# Altium PCB PCB1.PcbDoc
Units mm, origin at the board's own origin, x right, y up, seen from the top; angles counter-clockwise.
Board outline 86 x 56 mm, 2 copper layers (Top Layer, Bottom Layer), stack 1.771 mm thick; 17 components, 86 nets, 195 pads, 51 vias.
Unrouted connection lines stored in the file: 1.
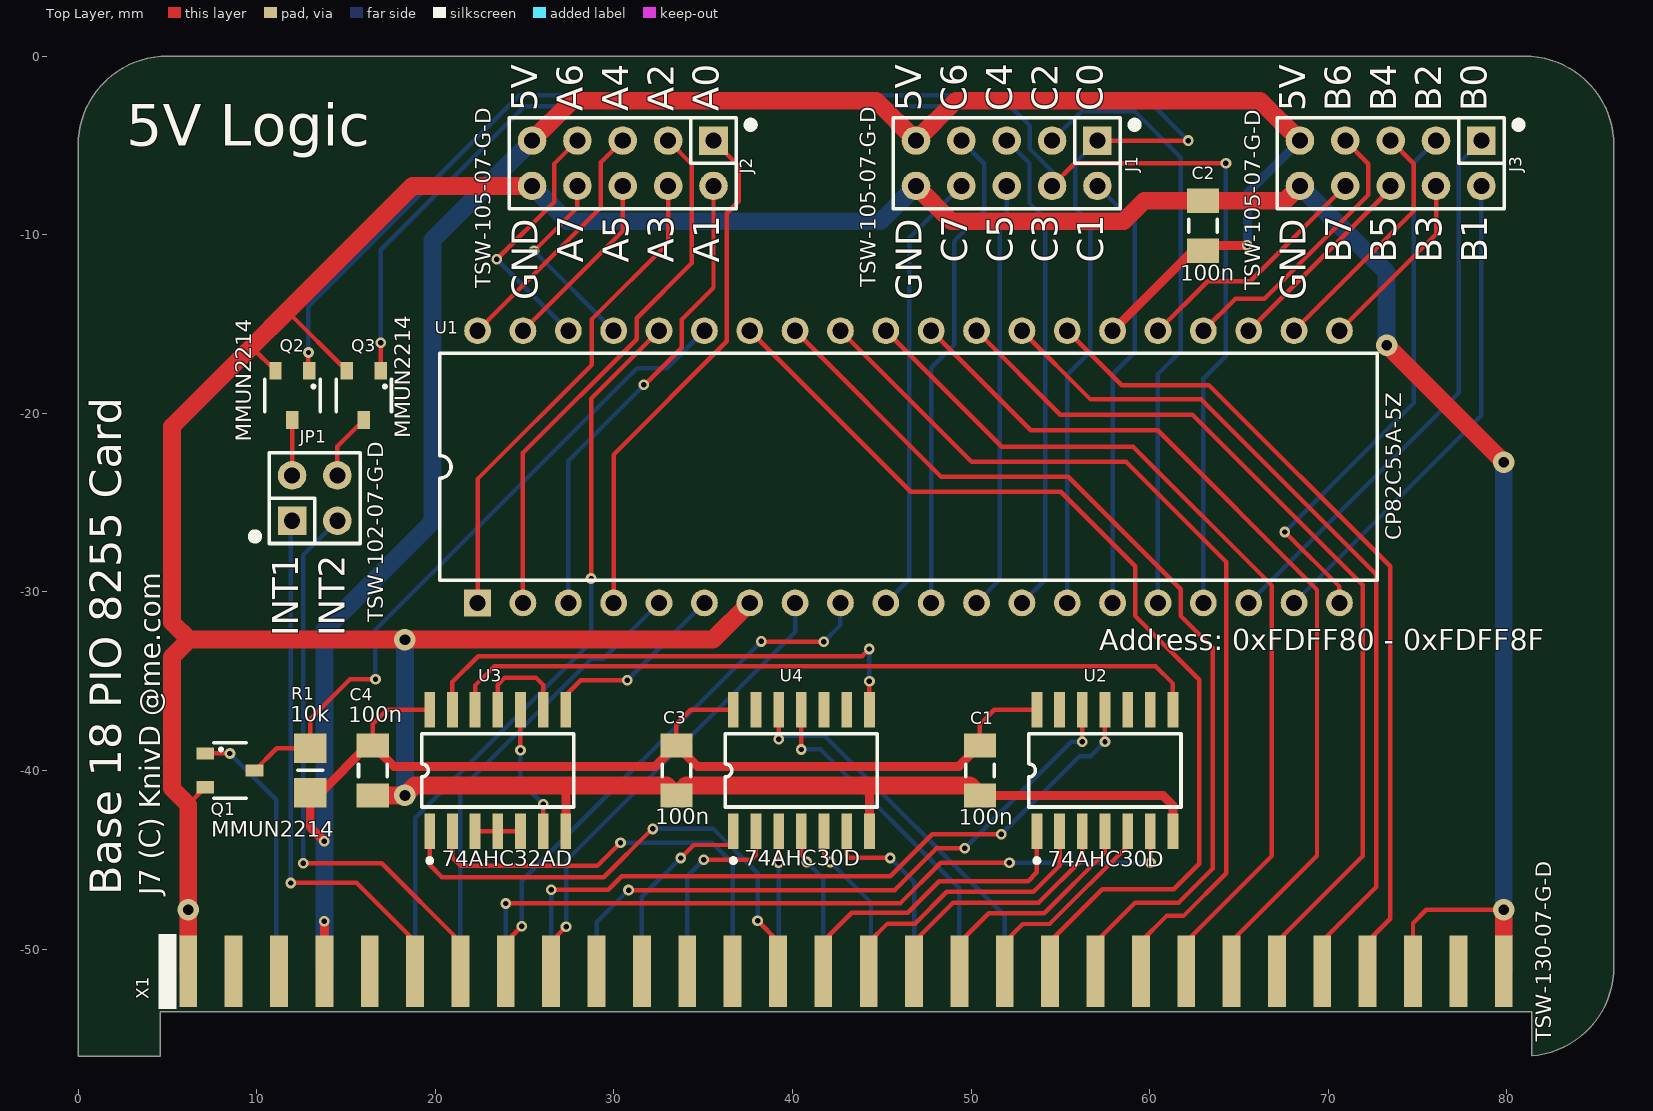
[diagram p0: Top Layer view]
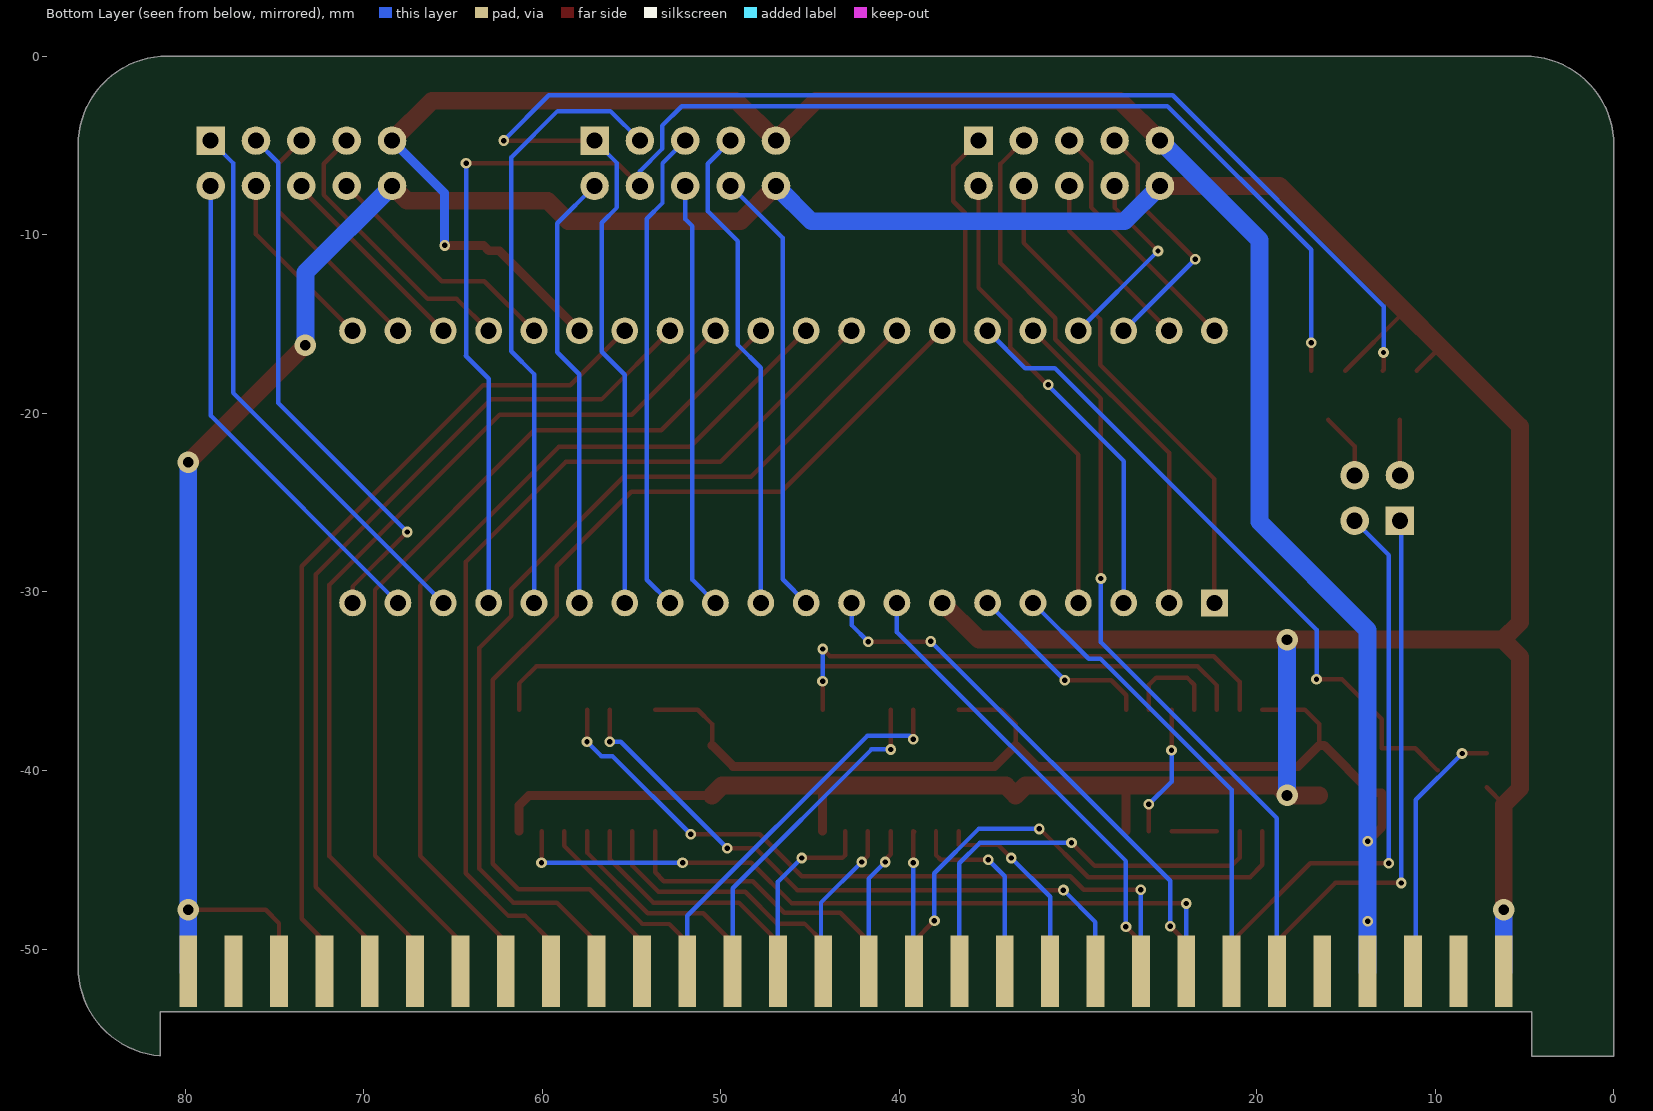
[diagram p1: Bottom Layer view, seen from below]
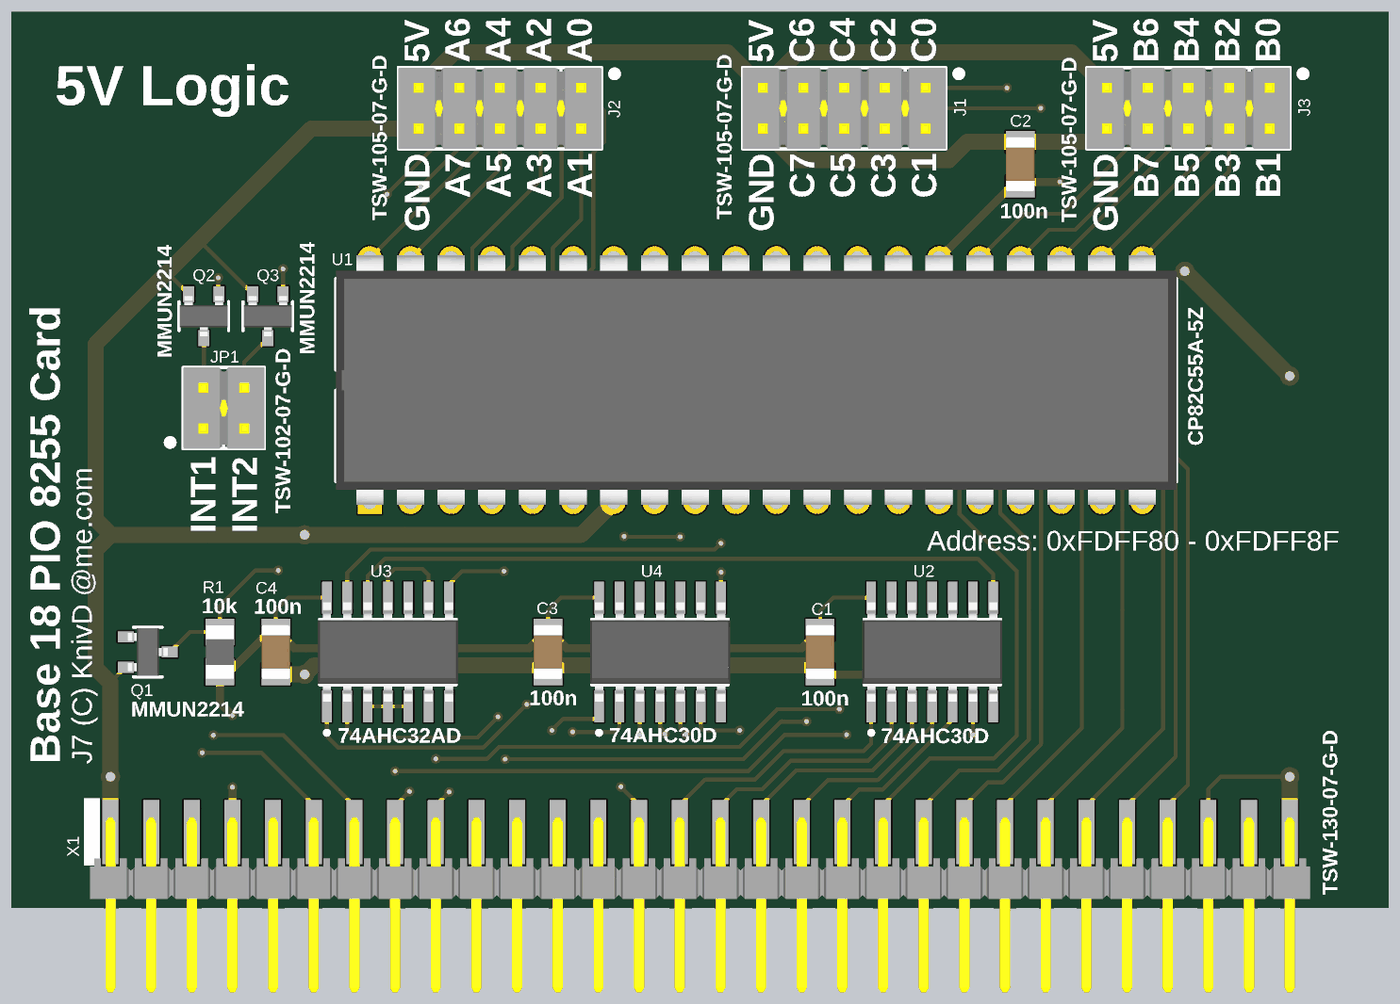
[diagram p2: 3D render of the assembled board from above, using the file's embedded part models]

## Layer stack, top to bottom
Top Solder: solder mask 0.0102, Solder Resist, Dk 3.5
Top Layer: signal copper 0.0356
Dielectric 1: core 1.7, FR-4, Dk 4.2
Bottom Layer: signal copper 0.0356
Solder Side: solder mask 0.0102, Solder Resist, Dk 3.5

## Board outline
0,-56 0,-5 cw(c5,-5) 5,0 81,0 cw(c81,-5) 86,-5 86,-51 cw(c81,-51) 81.399,-55.984 81.4,-55.984 81.4,-53.5 4.6,-53.5 4.6,-56

## Design rules (kind name [scope] priority, off if disabled: settings)
Clearance Clearance_Pour [IsRegion] p1: gap=0.3 ignorepadtopadclearanceinfootprint=TRUE
Clearance [All] p2: gap=0.2 ignorepadtopadclearanceinfootprint=TRUE
Height [All] p1: minheight=0 maxheight=100 prefheight=12.7
HoleSize [All] p1: absolutevalues=TRUE maxlimit=5 minlimit=0.025 maxpercent=80.000 minpercent=20.000
HoleToHoleClearance [All] p1: gap=0 allowstackedmicrovias=TRUE
MinimumSolderMaskSliver [All] p1: minsoldermaskwidth=0
PolygonConnect [All] p1: thpad.connectstyle=Relief thpad.reliefconductorwidth=0.25 thpad.reliefentries=4 thpad.polygonreliefangle="90 Angle" thpad.airgapwidth=0.25 smdpad.connectstyle=Relief smdpad.reliefconductorwidth=0.25 smdpad.reliefentries=4 smdpad.polygonreliefangle="90 Angle" smdpad.airgapwidth=0.25 via.connectstyle=Direct via.reliefconductorwidth=0.254 via.reliefentries=4 via.polygonreliefangle="45 Angle" via.airgapwidth=0.254
RoutingVias [All] p1: holewidth=0.3 width=0.6 viastyle="Through Hole" minholewidth=0.25 minwidth=0.5 maxholewidth=1.5 maxwidth=3
SilkToSilkClearance [All] p1: silktosilkclearance=-10
SilkToSolderMaskClearance [IsPad] p1: minsilkscreentomaskgap=-10 clearancetoexposedcopper=TRUE
SolderMaskExpansion SolderMaskExpansion_VIA [IsVia] p1: expansion=-0.3 soldermaskfromhole=TRUE
SolderMaskExpansion [All] p2: expansion=0.102
Width [All] p1: maxlimit=10 minlimit=0.2 preferedwidth=0.25
24 further rules are at their usual default settings.

## Components (designator, comment, footprint, x,y, rotation, side; value= is the part's Value field where it differs from the comment)
C1 "100n" CAPC3216X110N 50.5,-40 r90 top locked
C2 "100n" CAPC3216X110N 63,-9.5 r270 top locked
C3 "100n" CAPC3216X110N 33.5,-40 r90 top locked
C4 "100n" CAPC3216X110N 16.5,-40 r90 top locked
J1 "TSW-105-07-G-D" 2011-2X05S 52,-6 r180 top locked
J2 "TSW-105-07-G-D" 2011-2X05S 30.5,-6 r180 top locked
J3 "TSW-105-07-G-D" 2011-2X05S 73.5,-6 r180 top locked
JP1 "TSW-102-07-G-D" 2011-2X02S 13.25,-24.75 r0 top locked
Q1 "MMUN2214" SOT23-3 8.5,-40 r270 top locked
Q2 "MMUN2214" SOT23-3 12,-19 r180 top locked
Q3 "MMUN2214" SOT23-3 16,-19 r180 top locked
R1 "10k" RESC3216X75N 13,-40 r90 top locked
U1 "CP82C55A-5Z" DIP40-600 46.5,-23 r90 top locked
U2 "74AHC30D" SOIC14 57.5,-40 r90 top locked
U3 "74AHC32AD" SOIC14 23.5,-40 r90 top locked
U4 "74AHC30D" SOIC14 40.5,-40 r90 top locked
X1 "TSW-130-07-G-D" DIL60-M-EDGE 43,-50.45 r0 top locked

## Footprints (in the part's own frame and the unit in brackets; to place one, negate y for a bottom-side part, rotate by r counter-clockwise, add the part's x,y. Pads: shape width x height; smd on the part's side, far side on the other; paste and mask are expansions set on the pad)
2011-2X02S [mm] "2011-2X02 Straight Pin Header"
  rect 1.6x1.6 hole 0.9: 1(-1.27,-1.27)
  round 1.6 hole 0.9: 2(-1.27,1.27) 3(1.27,-1.27) 4(1.27,1.27)
  silkscreen extent -2.54,-2.54 2.54,2.54, body extent -2.54,-2.54 2.54,2.54, height 8.38
2011-2X05S [mm] "2011-2X05 Straight Pin Header"
  rect 1.6x1.6 hole 0.9: 1(-5.08,-1.27)
  round 1.6 hole 0.9: 2(-5.08,1.27) 3(-2.54,-1.27) 4(-2.54,1.27) 5(0,-1.27) 6(0,1.27) 7(2.54,-1.27) 8(2.54,1.27) 9(5.08,-1.27) 10(5.08,1.27)
  silkscreen extent -6.35,-2.54 6.35,2.54, body extent -6.35,-2.54 6.35,2.54, height 8.38
CAPC3216X110N [mm] "Chip Capacitor, Body 3.2x1.6mm, IPC Medium Density"
  rect 1.35x1.8 smd: 1(-1.4,0) 2(1.4,0)
  silkscreen extent -0.35,-0.8 0.35,0.8, body extent -1.7,-0.9 1.7,0.9, height 1.1
DIL60-M-EDGE [mm] "DIL60 header soldered as edge connector"
  rect 1x4 smd: 1(-36.83,-0.8) 3(-34.29,-0.8) 5(-31.75,-0.8) 7(-29.21,-0.8) 9(-26.67,-0.8) 11(-24.13,-0.8) 13(-21.59,-0.8) 15(-19.05,-0.8) 17(-16.51,-0.8) 19(-13.97,-0.8) 21(-11.43,-0.8) 23(-8.89,-0.8) 25(-6.35,-0.8) 27(-3.81,-0.8) 29(-1.27,-0.8) 31(1.27,-0.8) 33(3.81,-0.8) 35(6.35,-0.8) 37(8.89,-0.8) 39(11.43,-0.8) 41(13.97,-0.8) 43(16.51,-0.8) 45(19.05,-0.8) 47(21.59,-0.8) 49(24.13,-0.8) 51(26.67,-0.8) 53(29.21,-0.8) 55(31.75,-0.8) 57(34.29,-0.8) 59(36.83,-0.8)
  rect 1x4 smd far side: 2(-36.83,-0.8) 4(-34.29,-0.8) 6(-31.75,-0.8) 8(-29.21,-0.8) 10(-26.67,-0.8) 12(-24.13,-0.8) 14(-21.59,-0.8) 16(-19.05,-0.8) 18(-16.51,-0.8) 20(-13.97,-0.8) 22(-11.43,-0.8) 24(-8.89,-0.8) 26(-6.35,-0.8) 28(-3.81,-0.8) 30(-1.27,-0.8) 32(1.27,-0.8) 34(3.81,-0.8) 36(6.35,-0.8) 38(8.89,-0.8) 40(11.43,-0.8) 42(13.97,-0.8) 44(16.51,-0.8) 46(19.05,-0.8) 48(21.59,-0.8) 50(24.13,-0.8) 52(26.67,-0.8) 54(29.21,-0.8) 56(31.75,-0.8) 58(34.29,-0.8) 60(36.83,-0.8)
  silkscreen extent -38.5,-2.9 -37.5,1.3, body extent -38.1,-10.83 38.1,0.09, height 1.64
DIP40-600 [mm] "40 Leads Dual In-Line Package, Row Spacing 15.24mm; Pitch 2.54mm"
  rect 1.5x1.5 hole 0.9: 1(-7.62,24.13)
  round 1.5 hole 0.9: 2(-7.62,21.59) 3(-7.62,19.05) 4(-7.62,16.51) 5(-7.62,13.97) 6(-7.62,11.43) 7(-7.62,8.89) 8(-7.62,6.35) 9(-7.62,3.81) 10(-7.62,1.27) 11(-7.62,-1.27) 12(-7.62,-3.81) 13(-7.62,-6.35) 14(-7.62,-8.89) 15(-7.62,-11.43) 16(-7.62,-13.97) 17(-7.62,-16.51) 18(-7.62,-19.05) 19(-7.62,-21.59) 20(-7.62,-24.13) 21(7.62,-24.13) 22(7.62,-21.59) 23(7.62,-19.05) 24(7.62,-16.51) 25(7.62,-13.97) 26(7.62,-11.43) 27(7.62,-8.89) 28(7.62,-6.35) 29(7.62,-3.81) 30(7.62,-1.27) 31(7.62,1.27) 32(7.62,3.81) 33(7.62,6.35) 34(7.62,8.89) 35(7.62,11.43) 36(7.62,13.97) 37(7.62,16.51) 38(7.62,19.05) 39(7.62,21.59) 40(7.62,24.13)
  silkscreen extent -6.35,-26.25 6.35,26.25, body extent -7.8,-26.25 7.8,26.25, height 4.7
RESC3216X75N [mm] "Chip Resistor, EIA 1206, Metric 3216, Body 3.2x1.6mm, IPC Medium Density"
  rect 1.65x1.8 smd: 1(-1.25,0) 2(1.25,0)
  silkscreen extent 0,-0.7 0,0.7, body extent -1.67,-0.87 1.68,0.88, height 0.75
SOIC14 [mm] "SOIC14 Package"
  rect 2x0.6 smd: 1(-3.4,3.81) 2(-3.4,2.54) 3(-3.4,1.27) 4(-3.4,0) 5(-3.4,-1.27) 6(-3.4,-2.54) 7(-3.4,-3.81) 8(3.4,-3.81) 9(3.4,-2.54) 10(3.4,-1.27) 11(3.4,0) 12(3.4,1.27) 13(3.4,2.54) 14(3.4,3.81)
  silkscreen extent -5.17,-4.26 2.05,4.26, body extent -3.1,-4.38 3.1,4.37, height 1.75
SOT23-3 [mm] "SOT23-3 Package"
  rect 0.69x0.99 smd: 1(-0.95,-1.375) 2(0.95,-1.375) 3(0,1.375)
  silkscreen extent -1.55,-0.9 1.55,0.9, body extent -1.5,-1.25 1.5,1.25, height 1.2

## Part data
C1 C2 C3 C4: library part Capacitor, "Capacitor"
J1 J2 J3: library part "Connector 2x5", "Dual row, 10-way connector"
JP1: library part "Jumper 2x2", "2.54mm square pin header/jumper"
Q1 Q2 Q3: library part "NPN BIASED", "NPN biased bipolar transistor"
R1: library part Resistor, "Resistor"
U1: library part "82C55A DIP40", "CMOS Programmable Peripheral Interface", Manufacturer=Renesas
U2 U4: library part 74HCT30N, "8-Input NAND Gate", Case=DIP14-300, Manufacturer="NXP SEMICONDUCTORS", Author="CERN DEM JLC", ComponentHeight=4.2mm, Component Type=Standard, CreateDate=11/12/2012, Device=74HCT30N, HelpURL=\\cern.ch\dfs\Applications\Altium\Datasheets\74HCT30N.pdf, LatestRevisionDate=11/12/2012, Manufacturer Part Number=74HCT30N, Mounted=Yes, PackageDescription="DIP; 14 Leads; Row Spacing 7.62 mm; Pitch 2.54 mm", Part Description="8-Input NAND Gate", Part Number=74HCT30N, Pin Count=11, SMD=No, Socket=Yes, Table="Standard Logic"
U3: library part 74HCT32N, "Quad 2-Input OR Gate", Case=DIP14-300, Manufacturer="NXP SEMICONDUCTORS", Author="CERN DEM JLC", ComponentHeight=4.2mm, Component Type=Standard, CreateDate=11/12/2012, Device=74HCT32N, HelpURL=\\cern.ch\dfs\Applications\Altium\Datasheets\74HCT32N.pdf, LatestRevisionDate=11/12/2012, Manufacturer Part Number=74HCT32N, Mounted=Yes, PackageDescription="DIP; 14 Leads; Row Spacing 7.62 mm; Pitch 2.54 mm", Part Description="Quad 2-Input OR Gate", Part Number=74HCT32N, Pin Count=14, SMD=No, Socket=Yes, Table="Standard Logic"
X1: library part "Connector 2x30", "Dual row, 60-way connector"

## Via types
v1: diameter 0.6, hole 0.3, Top Layer to Bottom Layer, tented both sides, 45 vias
v2: diameter 1.2, hole 0.6, Top Layer to Bottom Layer, tented both sides, 6 vias

## Nets (pads, with @x,y where several pads share a name; then routed paths per layer and width w, separated by ;. In a path a pad name is that pad's centre, name@x,y a point inside that pad or via, vN(x,y) a via of type N, cw(c..) or ccw(c..) an arc to the next point about the centre after c; other vN are vias at no path point)
+5V: C1.2 C2.2 C3.2 C4.2 J1.9 J2.9 J3.9 R1.1 U1.26 U2.14 U3.14 U4.14 X1.7 X1.8 | length 175.2
  Top Layer w0.25: C4.2 16.5,-37.4 17.3,-36.6 U3.14 ; C3.2 33.5,-37.4 34.3,-36.6 U4.14 ; C1.2 50.5,-37.4 51.3,-36.6 U2.14
  Top Layer w0.5: X1.7 v1(13.79,-48.45) ; v1(13.79,-43.965) 13,-43.175 R1.1 13.575,-41.25 16.225,-38.6 C4.2 17.675,-39.775 32.325,-39.775 C3.2 34.675,-39.775 49.325,-39.775 C1.2 ; U1.26 62.41,-10.9 C2.2 63.3,-10.6 v1(65.475,-10.6)
  Top Layer w1: J2.9 27.65,-2.5 44.69,-2.5 J1.9 49.15,-2.5 66.19,-2.5 J3.9
  Bottom Layer w0.5: v1(65.475,-10.6) 65.475,-7.675 J3.9
  Bottom Layer w1: X1.8 v1(13.79,-48.45) v1(13.79,-43.965) 13.79,-32.135 19.85,-26.075 19.85,-10.3 J2.9
+Vin: X1.57 X1.58
A00: U1.9 X1.15 | length 30.5
  Top Layer w0.25: X1.15 23.95,-49.625 v1(24.85,-48.725) ; v1(38.25,-32.775) 38.275,-32.8 v1(41.75,-32.8)
  Bottom Layer w0.25: v1(24.85,-48.725) 24.85,-46.175 v1(38.25,-32.775) ; v1(41.75,-32.8) 42.69,-31.86 U1.9
A01: U1.8 X1.17 | length 26.3
  Top Layer w0.25: X1.17 26.49,-49.585 v1(27.325,-48.75)
  Bottom Layer w0.25: v1(27.325,-48.75) 27.325,-45.075 40.15,-32.25 U1.8
A02: X1.19
A03: X1.21
A04: X1.23
A05: X1.25
A06: U3.1 X1.27 | length 28.6
  Top Layer w0.25: U3.1 19.69,-45.29 20.375,-45.975 29.439,-45.975 32.139,-43.275 v1(32.175,-43.275) ; v1(38.05,-48.425) 39.19,-49.565 X1.27
  Bottom Layer w0.25: v1(32.175,-43.275) 35.575,-43.275 38.05,-45.75 v1(38.05,-48.425)
A07: U2.1 X1.29 | length 17.5
  Top Layer w0.25: X1.29 41.73,-49.57 43.325,-47.975 46.45,-47.975 48.225,-46.2 53.2,-46.2 53.69,-45.71 U2.1
A08: U2.2 X1.31 | length 16
  Top Layer w0.25: X1.31 44.27,-49.63 45.325,-48.575 46.875,-48.575 48.65,-46.8 53.5,-46.8 54.96,-45.34 U2.2
A09: U2.3 X1.33 | length 14.6
  Top Layer w0.25: X1.33 46.81,-49.59 49,-47.4 53.8,-47.4 56.23,-44.97 U2.3
A10: U2.4 X1.35 | length 13
  Top Layer w0.25: X1.35 49.35,-49.65 51,-48 54.1,-48 57.5,-44.6 U2.4
A11: U2.5 X1.37 | length 11.6
  Top Layer w0.25: X1.37 51.89,-49.61 52.9,-48.6 54.4,-48.6 58.77,-44.23 U2.5
A12: U2.6 X1.16 | length 42.6
  Top Layer w0.25: v1(23.95,-47.45) 46.025,-47.45 48.3,-45.175 v1(52.15,-45.175) ; U2.6 60.04,-45.165 v1(60.05,-45.175)
  Bottom Layer w0.25: X1.16 v1(23.95,-47.45) ; v1(52.15,-45.175) v1(60.05,-45.175)
A13: U2.11 X1.18 | length 40.8
  Top Layer w0.25: v1(26.49,-46.68) 29.695,-46.68 30.45,-45.925 45.475,-45.925 47.825,-43.575 v1(51.7,-43.575) ; v1(57.5,-38.395) U2.11
  Bottom Layer w0.25: X1.18 v1(26.49,-46.68) ; v1(51.7,-43.575) 56.075,-39.2 56.695,-39.2 v1(57.5,-38.395)
A14: U2.12 X1.20 | length 36
  Top Layer w0.25: v1(30.825,-46.7) 45.725,-46.7 48.1,-44.325 48.125,-44.35 v1(49.65,-44.35) ; v1(56.23,-38.395) U2.12
  Bottom Layer w0.25: X1.20 29.03,-48.495 v1(30.825,-46.7) ; v1(49.65,-44.35) 55.605,-38.395 v1(56.23,-38.395)
A15: U4.1 X1.22 | length 11.3
  Top Layer w0.25: v1(33.75,-44.9) 34.475,-44.175 36.69,-44.175 U4.1
  Bottom Layer w0.25: X1.22 31.57,-47.08 v1(33.75,-44.9)
A16: U4.2 X1.24 | length 11
  Top Layer w0.25: v1(35.04,-45) 37.7,-45 37.96,-44.74 U4.2
  Bottom Layer w0.25: X1.24 34.11,-45.93 v1(35.04,-45)
A17: U3.2 X1.26 | length 24.4
  Top Layer w0.25: U3.2 20.96,-44.885 21.425,-45.35 29.075,-45.35 v1(30.375,-44.05)
  Bottom Layer w0.25: v1(30.375,-44.05) 35.5,-44.05 36.65,-45.2 X1.26
A18: U4.3 X1.28 | length 7.9
  Top Layer w0.25: v1(39.225,-45.175) 39.225,-43.475 39.19,-43.44 U4.3
  Bottom Layer w0.25: X1.28 39.225,-51.215 v1(39.225,-45.175)
A19: U4.4 X1.30 | length 8.4
  Top Layer w0.25: U4.4 40.5,-44.7 40.8,-45 v1(40.8,-45.125)
  Bottom Layer w0.25: v1(40.8,-45.125) 41.73,-46.055 X1.30
A20: U4.5 X1.32 | length 9.1
  Top Layer w0.25: U4.5 41.77,-44.77 v1(42.125,-45.125)
  Bottom Layer w0.25: v1(42.125,-45.125) 44.4,-47.4 X1.32@44.4,-51.4
A21: U4.6 X1.34 | length 10.7
  Top Layer w0.25: U4.6 43.04,-44.74 43.2,-44.9 v1(45.475,-44.9)
  Bottom Layer w0.25: v1(45.475,-44.9) 46.81,-46.235 X1.34
A22: U4.11 X1.36 | length 18.9
  Top Layer w0.25: v1(40.5,-38.825) U4.11
  Bottom Layer w0.25: v1(40.5,-38.825) 41.575,-38.825 49.35,-46.6 X1.36
A23: U4.12 X1.38 | length 21.7
  Top Layer w0.25: v1(39.23,-38.25) U4.12
  Bottom Layer w0.25: v1(39.23,-38.25) 39.43,-38.05 41.8,-38.05 51.89,-48.14 X1.38
BUS#: X1.10
CS#: U1.6 U3.8 | length 10.7
  Top Layer w0.25: U3.8 27.31,-35.79 28.15,-34.95 v1(30.75,-34.95)
  Bottom Layer w0.25: v1(30.75,-34.95) 35.07,-30.63 U1.6
DB0: U1.34 X1.39 | length 57
  Top Layer w0.25: U1.34 46.63,-24.4 55.025,-24.4 59.2,-28.575 59.2,-31.35 62.775,-34.925 62.775,-45.225 61.35,-46.65 57.35,-46.65 54.43,-49.57 X1.39
DB1: U1.33 X1.41 | length 53.9
  Top Layer w0.25: U1.33 48.32,-23.55 55.45,-23.55 61.75,-29.85 61.75,-31.35 63.525,-33.125 63.525,-45.5 61.625,-47.4 59.2,-47.4 56.97,-49.63 X1.41
DB2: U1.32 X1.43 | length 52.4
  Top Layer w0.25: U1.32 50.035,-22.725 58.7,-22.725 64.3,-28.325 64.3,-45.75 61.9,-48.15 60.95,-48.15 59.51,-49.59 X1.43
DB3: U1.31 X1.45 | length 51.1
  Top Layer w0.25: U1.31 51.725,-21.875 59.075,-21.875 66.85,-29.65 66.85,-44.775 62.05,-49.575 X1.45
DB4: U1.30 X1.47 | length 51
  Top Layer w0.25: U1.30 53.34,-20.95 60.45,-20.95 69.375,-29.875 69.375,-44.775 64.59,-49.56 X1.47
DB5: U1.29 X1.49 | length 51.1
  Top Layer w0.25: U1.29 55.005,-20.075 62.4,-20.075 71.925,-29.6 71.925,-44.8 67.13,-49.595 X1.49
DB6: U1.28 X1.51 | length 49
  Top Layer w0.25: U1.28 56.695,-19.225 62.9,-19.225 72.7,-29.025 72.7,-46.525 69.67,-49.555 X1.51
DB7: U1.27 X1.53 | length 46.7
  Top Layer w0.25: U1.27 58.435,-18.425 63.325,-18.425 73.475,-28.575 73.475,-48.3 72.21,-49.565 X1.53
GND: C1.1 C2.1 C3.1 C4.1 J1.10 J2.10 J3.10 Q1.2 Q2.2 Q3.2 U1.7 U2.7 U3.7 U4.7 X1.1 X1.2 X1.55 X1.59 X1.60 | length 268.9
  Top Layer w0.25: 6.17,-41.92 6.17,-41.905 Q1.2 ; 9.7,-16.3 9.725,-16.3 Q2.2 ; 11.75,-14.25 11.75,-14.325 Q3.2 ; X1.55 74.75,-48.55 75.5,-47.8 v2(79.83,-47.8)
  Top Layer w0.5: U3.7 27.31,-40.89 27.35,-40.85 ; U4.7 44.31,-40.89 ; C1.1 60.75,-41.4 61.31,-41.96 U2.7
  Top Layer w1: X1.1 v2(6.17,-47.8) 6.17,-41.92 5.25,-41 5.25,-33.65 6.225,-32.675 ; C4.1 v2(18.3,-41.4) 18.85,-40.85 27.35,-40.85 32.95,-40.85 C3.1 34.05,-40.85 49.95,-40.85 C1.1 ; J2.10 18.73,-7.27 11.75,-14.25 9.7,-16.3 5.25,-20.75 5.25,-31.7 6.225,-32.675 ; U1.7 35.555,-32.675 v2(18.3,-32.675) 6.225,-32.675 ; J1.10 48.9,-9.25 58.55,-9.25 59.7,-8.1 C2.1 67.59,-8.1 J3.10 ; v2(73.275,-16.19) v2(79.83,-22.745) ; X1.59 v2(79.83,-47.8)
  Bottom Layer w1: X1.2 v2(6.17,-47.8) ; v2(18.3,-41.4) v2(18.3,-32.675) ; J2.10 27.4,-9.25 44.94,-9.25 J1.10 ; J3.10 73.275,-12.125 v2(73.275,-16.19) ; X1.60 v2(79.83,-47.8) v2(79.83,-22.745)
INT0#: X1.9
INT1#: JP1.1 X1.11 | length 30.3
  Top Layer w0.25: v1(11.9,-46.3) 15.6,-46.3 18.87,-49.57 X1.11
  Bottom Layer w0.25: v1(11.9,-46.3) 11.9,-26.1 JP1.1
INT2#: JP1.3 X1.13 | length 32.3
  Top Layer w0.25: v1(12.6,-45.2) 17,-45.2 21.41,-49.61 X1.13
  Bottom Layer w0.25: v1(12.6,-45.2) 12.6,-27.94 JP1.3
MCLR#: X1.5
MISO: X1.48
MOSI: X1.46
NetJ1_1: J1.1 Q2.1 U1.14 | length 91.2
  Top Layer w0.25: v1(12.9,-16.6) 12.9,-17.575 Q2.1 ; J1.1 v1(62.17,-4.73)
  Bottom Layer w0.25: v1(12.9,-16.6) 12.9,-14 24.7,-2.2 59.64,-2.2 v1(62.17,-4.73) ; U1.14 55.39,-17.835 56.675,-16.55 56.675,-9.325 55.825,-8.475 55.825,-5.985 J1.1
NetJ1_2: J1.2 U1.15 | length 24.7
  Bottom Layer w0.25: J1.2 59.175,-9.365 59.175,-16.575 57.93,-17.82 U1.15
NetJ1_3: J1.3 U1.16 | length 34.4
  Bottom Layer w0.25: J1.3 56.195,-3.075 59.15,-3.075 61.75,-5.675 61.75,-16.525 60.47,-17.805 U1.16
NetJ1_4: J1.4 Q3.1 U1.17 | length 86.2
  Top Layer w0.25: Q3.1 v1(16.95,-16.05) ; J1.4 55.81,-6 v1(64.275,-6)
  Bottom Layer w0.25: v1(16.95,-16.05) 16.95,-10.85 25,-2.8 52.2,-2.8 53.3,-3.9 53.3,-5.2 54.54,-6.44 J1.4 ; U1.17 63.01,-18.065 64.3,-16.775 64.275,-16.75 v1(64.275,-6)
NetJ1_5: J1.5 U1.13 | length 27.3
  Bottom Layer w0.25: J1.5 53.275,-6.005 53.275,-8.225 54.15,-9.1 54.15,-29.32 U1.13
NetJ1_6: J1.6 U1.12 | length 24.1
  Bottom Layer w0.25: U1.12 51.6,-29.33 51.6,-9.525 52,-9.125 J1.6
NetJ1_7: J1.7 U1.11 | length 27.7
  Bottom Layer w0.25: U1.11 47.77,-17.455 49.05,-16.175 49.05,-10.375 50.75,-8.675 50.75,-6.02 J1.7
NetJ1_8: J1.8 U1.10 | length 25.1
  Bottom Layer w0.25: U1.10 46.55,-29.3 46.55,-10.18 J1.8
NetJ2_1: J2.1 U1.4 | length 29.4
  Top Layer w0.25: U1.4 29.99,-22.31 36.325,-15.975 36.325,-8.8 37,-8.125 37,-6.15 J2.1
NetJ2_2: J2.2 U1.3 | length 26.7
  Top Layer w0.25: v1(31.675,-18.4) 31.725,-18.4 33.8,-16.325 33.8,-14.75 35.58,-12.97 J2.2
  Bottom Layer w0.25: U1.3 27.45,-22.675 31.675,-18.45 v1(31.675,-18.4)
NetJ2_3: J2.3 U1.2 | length 30.3
  Top Layer w0.25: U1.2 24.91,-22.215 31.275,-15.85 31.275,-14.675 34.35,-11.6 34.35,-6.04 J2.3
NetJ2_4: J2.4 U1.1 | length 27.8
  Top Layer w0.25: U1.1 22.37,-23.68 28.775,-17.275 28.775,-14.725 33.04,-10.46 J2.4
NetJ2_5: J2.5 U1.40 | length 14
  Top Layer w0.25: U1.40 29.275,-8.475 29.275,-5.955 J2.5
NetJ2_6: J2.6 U1.39 | length 10.4
  Top Layer w0.25: U1.39 30.5,-9.79 J2.6
NetJ2_7: J2.7 U1.38 | length 14.2
  Top Layer w0.25: v1(23.447,-11.377) 26.675,-8.15 26.675,-6.015 J2.7
  Bottom Layer w0.25: v1(23.447,-11.377) U1.38
NetJ2_8: J2.8 U1.37 | length 11
  Top Layer w0.25: v1(25.525,-10.915) 27.96,-8.48 J2.8
  Bottom Layer w0.25: v1(25.525,-10.915) U1.37
NetJ3_1: J3.1 U1.18 | length 31.3
  Bottom Layer w0.25: U1.18 77.325,-18.845 77.325,-5.985 J3.1
NetJ3_2: J3.2 U1.19 | length 27.7
  Bottom Layer w0.25: U1.19 78.58,-20.13 J3.2
NetJ3_3: J3.3 U1.20 | length 30.7
  Top Layer w0.25: v1(67.575,-26.65) 70.63,-29.705 U1.20
  Bottom Layer w0.25: v1(67.575,-26.65) 74.8,-19.425 74.8,-5.97 J3.3
NetJ3_4: J3.4 U1.21 | length 10.4
  Top Layer w0.25: U1.21 76.04,-9.97 J3.4
NetJ3_5: J3.5 U1.22 | length 14
  Top Layer w0.25: U1.22 74.8,-8.67 74.8,-6.03 J3.5
NetJ3_6: J3.6 U1.23 | length 11.4
  Top Layer w0.25: U1.23 73.5,-7.43 J3.6
NetJ3_7: J3.7 U1.24 | length 16
  Top Layer w0.25: U1.24 64.79,-13.6 66.425,-13.6 72.25,-7.775 72.25,-6.02 J3.7
NetJ3_8: J3.8 U1.25 | length 13.8
  Top Layer w0.25: U1.25 63.25,-12.6 65.63,-12.6 J3.8
NetJP1_2: JP1.2 Q2.3 | length 3.1
  Top Layer w0.25: JP1.2 12,-23.46 Q2.3
NetJP1_4: JP1.4 Q3.3 | length 3.7
  Top Layer w0.25: JP1.4 14.52,-21.855 Q3.3
NetU2_8: U2.8 U3.12 | length 42.7
  Top Layer w0.25: U3.12 22.23,-35.245 23.3,-34.175 60.35,-34.175 61.31,-35.135 U2.8
NetU3_3: U3.3 U3.4 U3.5 | length 2.5
  Top Layer w0.25: U3.3 U3.5
NetU3_6: U3.6 U3.10 | length 7.3
  Top Layer w0.25: v1(24.77,-38.87) U3.10 ; U3.6 v1(26.04,-41.9)
  Bottom Layer w0.25: v1(24.77,-38.87) 24.77,-40.63 v1(26.04,-41.9)
NetU3_9: U3.9 U3.11 | length 5.7
  Top Layer w0.25: U3.11 23.5,-35.2 23.9,-34.8 25.625,-34.8 26.04,-35.215 U3.9
NetU3_13: U3.13 U4.8 | length 29.1
  Top Layer w0.25: U3.13 20.96,-35.04 22.4,-33.6 43.9,-33.6 v1(44.3,-33.2) ; U4.8 v1(44.31,-35.01)
  Bottom Layer w0.25: v1(44.3,-33.2) 44.31,-33.21 v1(44.31,-35.01)
RD#: U1.5 X1.14 | length 25.6
  Bottom Layer w0.25: X1.14 21.41,-41.09 28.75,-33.75 29.4,-33.75 U1.5
RESET#: Q1.1 X1.6 | length 14.7
  Top Layer w0.25: Q1.1 v1(8.5,-39.05)
  Bottom Layer w0.25: v1(8.5,-39.05) 11.1,-41.65 11.1,-51.1 X1.6
RST: Q1.3 R1.2 U1.35 | length 38
  Top Layer w0.25: Q1.3 11.125,-38.75 R1.2 13,-37.125 15.225,-34.9 v1(16.65,-34.9)
  Bottom Layer w0.25: v1(16.65,-34.9) 16.65,-32.125 31.3,-17.475 32.975,-17.475 U1.35
RXD: X1.42
SCLK: X1.44
SEL0#: X1.50
SEL1#: X1.52
SEL2#: X1.54
SEL3#: X1.56
TXD: X1.40
VCC: 
WR#: U1.36 X1.12 | length 41.5
  Top Layer w0.25: v1(28.725,-29.25) 28.725,-19.185 U1.36
  Bottom Layer w0.25: X1.12 18.87,-42.68 28.725,-32.825 v1(28.725,-29.25)
pads on no net: U2.9 U2.10 U2.13 U4.9 U4.10 U4.13 X1.3 X1.4

## Silkscreen, mask and mechanical layers (free items; w line width, h text height)
Top Overlay:
  circle w0.4: c80.66,-3.85 r0.2
  circle w0.4: c59.16,-3.85 r0.2
  circle w0.4: c37.66,-3.85 r0.2
  circle w0.4: c9.9,-26.9 r0.2
  text "5V" at 26.2,-3.1 h2.5 r90
  text "A6" at 28.74,-3.1 h2.5 r90
  text "A4" at 31.28,-3.1 h2.5 r90
  text "A2" at 33.82,-3.1 h2.5 r90
  text "A0" at 36.36,-3.1 h2.5 r90
  text "5V" at 47.7,-3.1 h2.5 r90
  text "C6" at 50.24,-3.1 h2.5 r90
  text "C4" at 52.78,-3.1 h2.5 r90
  text "C2" at 55.32,-3.1 h2.5 r90
  text "C0" at 57.86,-3.1 h2.5 r90
  text "5V" at 69.2,-3.1 h2.5 r90
  text "B6" at 71.74,-3.1 h2.5 r90
  text "B4" at 74.28,-3.1 h2.5 r90
  text "B2" at 76.82,-3.1 h2.5 r90
  text "B0" at 79.36,-3.1 h2.5 r90
  text "5V Logic" at 2.7,-5.8 h4
  text "A7" at 28.76,-11.57 h2.5 r90
  text "A5" at 31.3,-11.57 h2.5 r90
  text "A3" at 33.84,-11.57 h2.5 r90
  text "A1" at 36.38,-11.57 h2.5 r90
  text "C7" at 50.26,-11.57 h2.5 r90
  text "C5" at 52.8,-11.57 h2.5 r90
  text "C3" at 55.34,-11.57 h2.5 r90
  text "C1" at 57.88,-11.57 h2.5 r90
  text "B7" at 71.76,-11.57 h2.5 r90
  text "B5" at 74.3,-11.57 h2.5 r90
  text "B3" at 76.84,-11.57 h2.5 r90
  text "B1" at 79.38,-11.57 h2.5 r90
  text "GND" at 26.22,-13.67 h2.5 r90
  text "GND" at 47.72,-13.67 h2.5 r90
  text "GND" at 69.22,-13.67 h2.5 r90
  text "INT1" at 12.8,-32.5 h2.5 r90
  text "INT2" at 15.4,-32.5 h2.5 r90
  text "Address: 0xFDFF80 - 0xFDFF8F" at 57.175,-33.65 h2
  text "Base 18 PIO 8255 Card" at 3,-47 h3 r90
  text "J7 (C) KnivD @me.com" at 5,-47 h2 r90
Mechanical 1:
  lines w0.4: 81.399,-55.984 ccw(c81,-51) 86,-51 86,-5 ccw(c81,-5) 81,0 5,0 ccw(c5,-5) 0,-5 0,-56 4.6,-56 4.6,-53.5 81.4,-53.5 81.4,-55.984
Drill Drawing:
  text "PCB parameters: HASL, FR-4, 1.8mm / 1oz, green soldermask, white overlay" at 7.5,-69 h2